# Altium PCB door_connect_1.5.PcbDoc
Units mil, origin at the board's own origin, x right, y up, seen from the top; angles counter-clockwise.
Board outline 1968.5 x 1880 mil, 2 copper layers (Top Layer, Bottom Layer); 2 components, 8 nets, 24 pads, 1 vias.
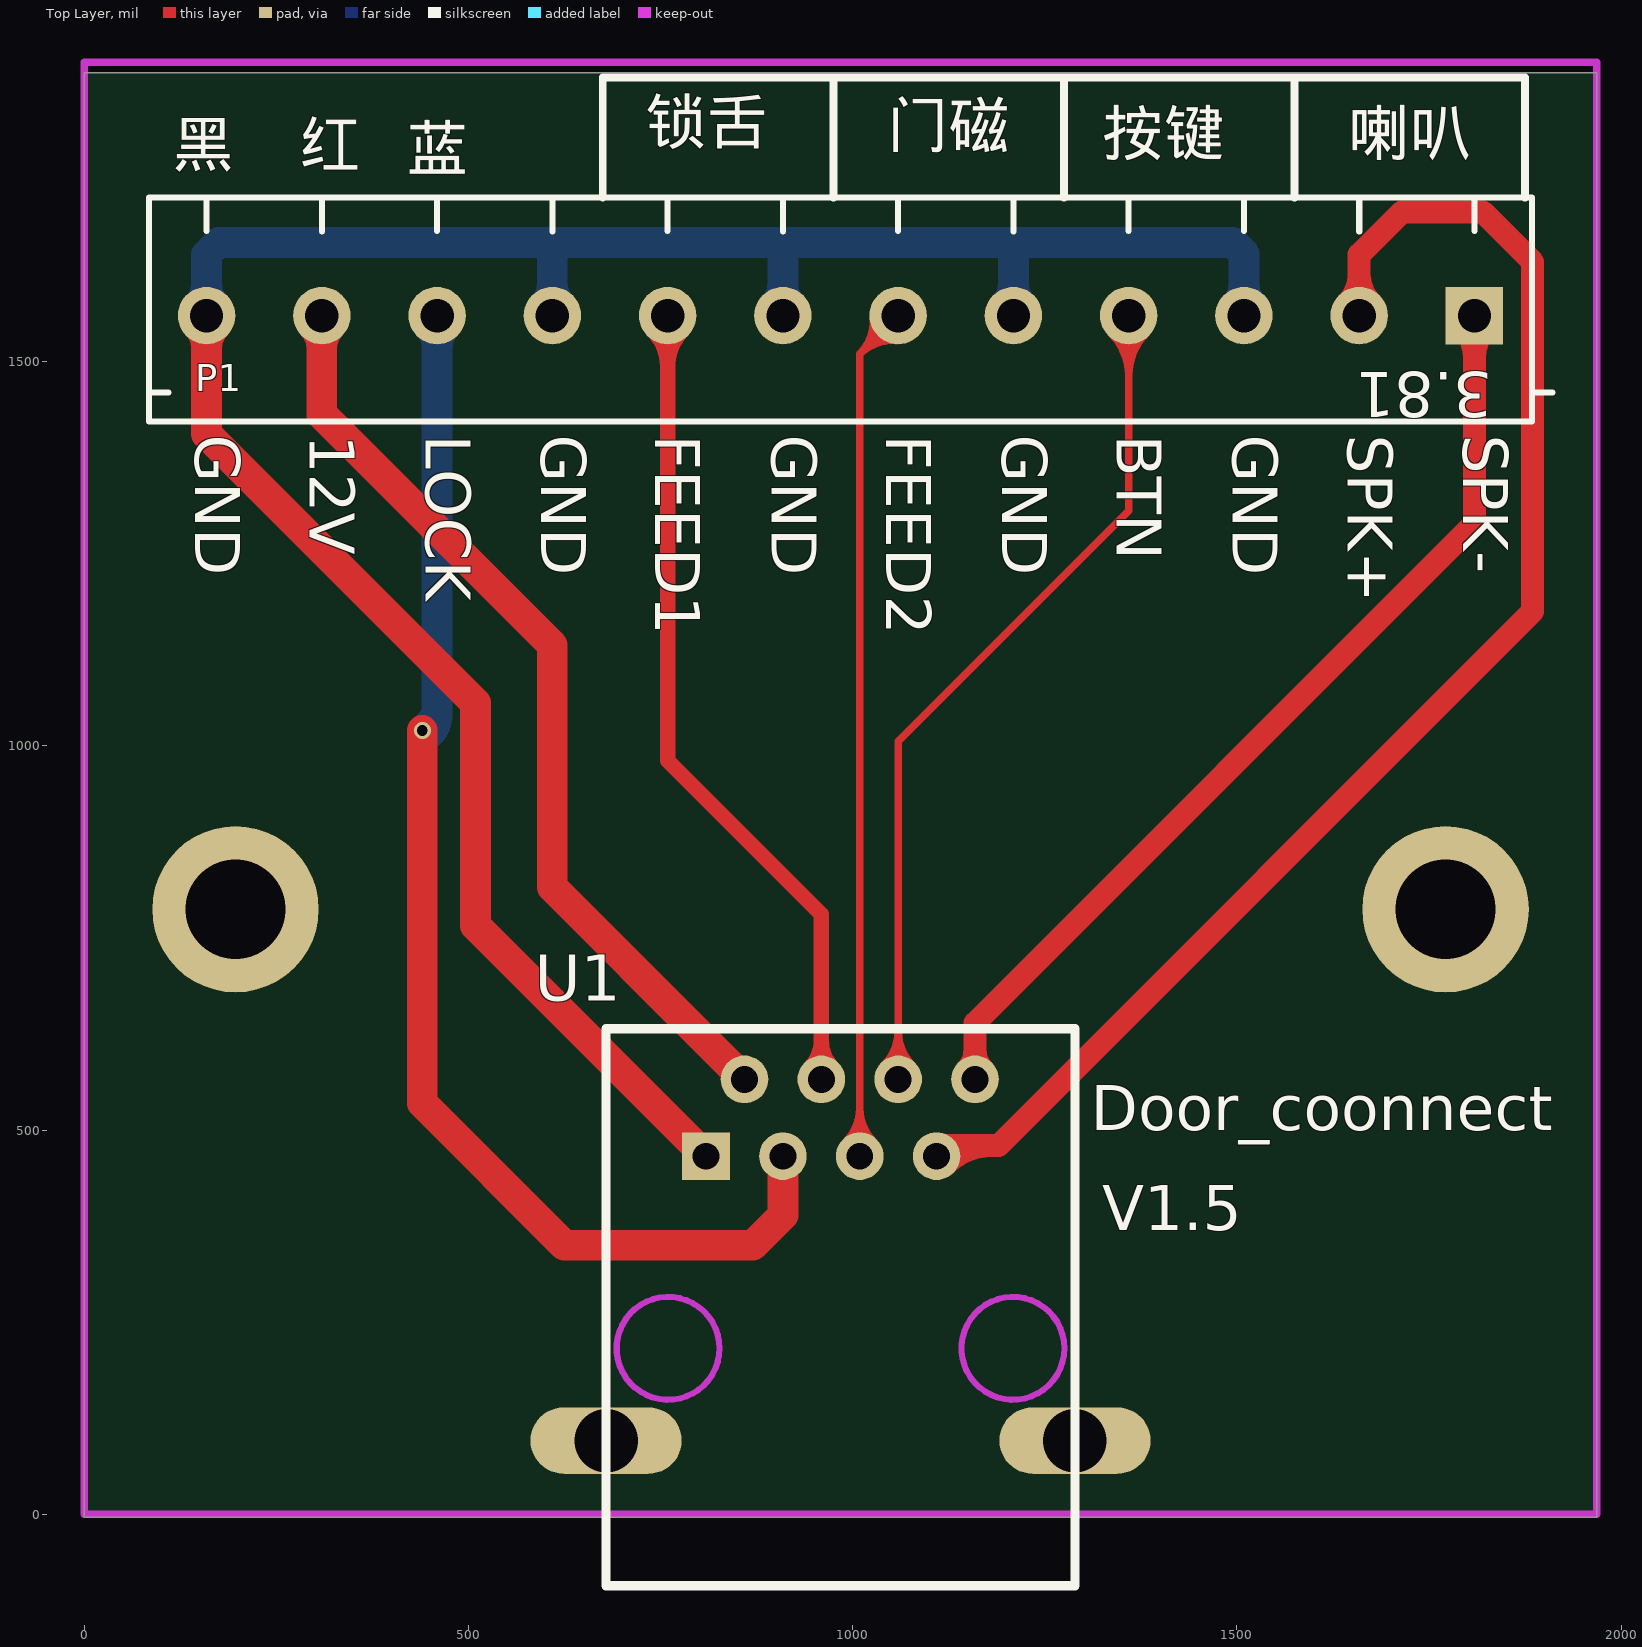
[diagram p0: Top Layer view]
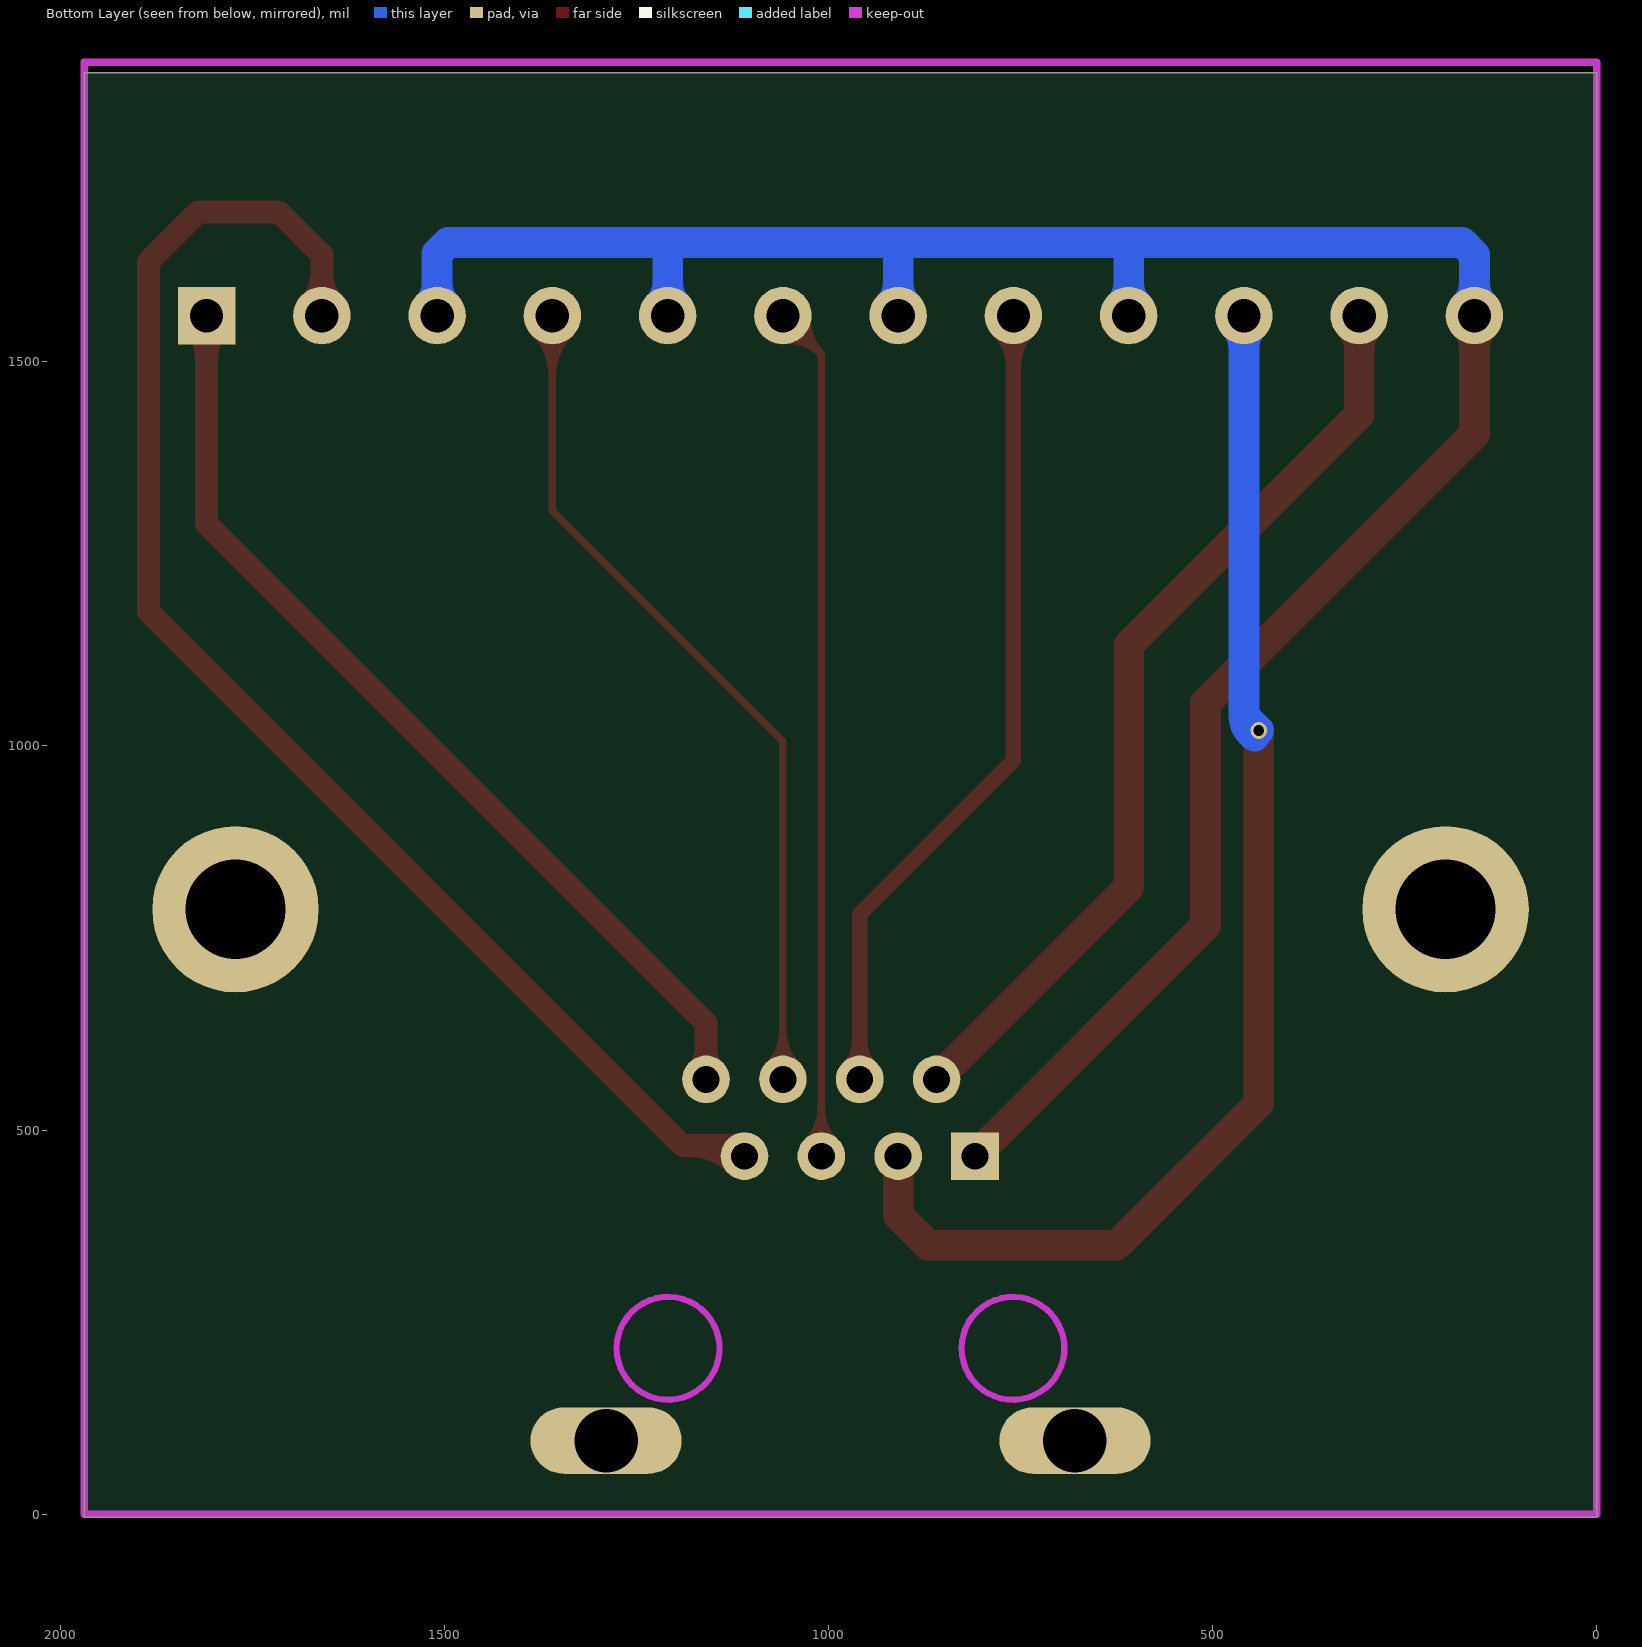
[diagram p1: Bottom Layer view, seen from below]

## Layer stack, top to bottom
Top Layer: signal copper 1.4
Dielectric: dielectric 12.6, FR-4, Dk 4.8
Bottom Layer: signal copper 1.4

## Board outline
0,-3.94 1968.5,-3.94 1968.5,1876.06 0,1876.06

## Design rules (kind name [scope] priority, off if disabled: settings)
Clearance [All] p1: gap=7
ComponentClearance [All] p1: gap=0 collisioncheckmode=3 verticalgap=0 showdistances=FALSE
HoleSize [All] p1: absolutevalues=TRUE maxlimit=1000 minlimit=1 maxpercent=80.000 minpercent=20.000
HoleToHoleClearance [All] p1: gap=7 allowstackedmicrovias=TRUE
MinimumSolderMaskSliver [All] p1: minsoldermaskwidth=0
PolygonConnect [All] p1: connectstyle=Relief reliefconductorwidth=10 reliefentries=4 polygonreliefangle="90 Angle"
RoomDefinition IO [InComponentClass('IO')] p1: confinementstyle=ConfineIn formatcopy=TRUE lockcomponents=FALSE outline -3535.75,-2283.94 -1535.75,-2283.94 -1535.75,-1283.94 -3535.75,-1283.94
RoutingVias [All] p1: holewidth=14 width=22 viastyle="Through Hole" minholewidth=14 minwidth=22 maxholewidth=280 maxwidth=500
SilkToSilkClearance [All] p1: silktosilkclearance=0
SilkscreenOverComponentPads [All] p1: minsilkscreentomaskgap=0
SolderMaskExpansion [All] p1: expansion=4
TestPointUsage [All] p1: valid=0 allowmultiple=FALSE
Testpoint [All] p1: side=15 testpointundercomponent=TRUE minsize=40 maxsize=100 preferedsize=60 minholesize=0 maxholesize=40 preferedholesize=32 testpointgrid=1 style=1023 order=0123456789
Width [All] p1: maxlimit=100 minlimit=7 preferedwidth=7
18 further rules are at their usual default settings.

## Components (designator, comment, footprint, x,y, rotation, side; value= is the part's Value field where it differs from the comment)
P1 "Header 12" KF128-3.81-12 984.25,1560 r180 top
U1 "RJ45-DTE" RJ45 984.25,216.06 r180 top

## Footprints (in the part's own frame and the unit in brackets; to place one, negate y for a bottom-side part, rotate by r counter-clockwise, add the part's x,y. Pads: shape width x height; smd on the part's side, far side on the other; paste and mask are expansions set on the pad)
KF128-3.81-12 [mm]
  rect 1.9x1.9 hole 1.1: 1(-20.955,0)
  round 1.9 hole 1.1: 2(-17.145,0) 3(-13.335,0) 4(-9.525,0) 5(-5.715,0) 6(-1.905,0) 7(1.905,0) 8(5.715,0) 9(9.525,0) 10(13.335,0) 11(17.145,0) 12(20.955,0)
  silkscreen extent -23.52,-3.9 22.86,3.5
RJ45 [mil]
  oval 196.85x86.61 hole 82.68: 0(-305.12,120.08) 0(305.12,120.08)
  rect 62x62 hole 35: 1(175,-250)
  round 62 hole 35: 2(125,-350) 3(75,-250) 4(25,-350) 5(-25,-250) 6(-75,-350) 7(-125,-250) 8(-175,-350)
  Keep-Out Layer circle w8: c-224.41,0 r66.93
  Keep-Out Layer circle w8: c224.41,0 r66.93
  silkscreen extent -305,-416 305,309

## Part data
P1: "Header, 12-Pin"

## Free pads (board coordinates)
  round 216.54 hole 129.92: 0(196.85,787.4) 0(1771.65,787.4)

## Via types
v1: diameter 22, hole 14, Top Layer to Bottom Layer, 1 vias

## Nets (pads, with @x,y where several pads share a name; then routed paths per layer and width w, separated by ;. In a path a pad name is that pad's centre, name@x,y a point inside that pad or via, vN(x,y) a via of type N, cw(c..) or ccw(c..) an arc to the next point about the centre after c; other vN are vias at no path point)
BTN: P1.4 U1.6 | length 1485.3
  Top Layer w10: U1.6@1040.87,584.45 ccw(c996.48,628.83) 1059.25,628.83 ccw(c1122.02,628.83) U1.6@1077.64,584.45 ; U1.6@1047.94,577.38 ccw(c1020.62,604.69) 1059.25,604.69 ccw(c1097.88,604.69) U1.6@1070.57,577.38 ; U1.6 1059.25,1006.06 1359.25,1306.06 P1.4 ; P1.4@1336.34,1537.09 cw(c1281.03,1481.78) 1359.25,1481.78 cw(c1437.48,1481.78) P1.4@1382.16,1537.09 ; P1.4@1343.41,1544.16 cw(c1305.17,1505.92) 1359.25,1505.92 cw(c1413.33,1505.92) P1.4@1375.09,1544.16
D12V: P1.11 U1.2 | length 1287.7
  Top Layer w40: P1.11@296.95,1547.7 cw(c267.24,1517.99) 309.25,1517.99 cw(c351.26,1517.99) P1.11@321.56,1547.7 ; P1.11 309.25,1431.06 609.25,1131.06 609.25,816.06 812.66,612.66 U1.2
FEED1: P1.8 U1.4 | length 1260.3
  Top Layer w20: P1.8@739.88,1540.62 cw(c693.1,1493.85) 759.25,1493.85 cw(c825.41,1493.85) P1.8@778.63,1540.62 ; P1.8 759.25,980.75 959.25,780.75 U1.4 ; U1.4@944.4,580.91 ccw(c908.55,616.76) 959.25,616.76 ccw(c1009.95,616.76) U1.4@974.1,580.91
FEED2: P1.6 U1.5 | length 1451.1
  Top Layer w10: U1.5@990.87,484.45 ccw(c946.48,528.83) 1009.25,528.83 ccw(c1072.02,528.83) U1.5@1027.64,484.45 ; U1.5@997.94,477.38 ccw(c970.62,504.69) 1009.25,504.69 ccw(c1047.88,504.69) U1.5@1020.57,477.38 ; U1.5 1009.25,1510 ; P1.6@1026.94,1557.6 cw(c966.16,1553.1) 1009.25,1510 ; P1.6@1036.91,1558.34 cw(c994.89,1555.23) 1024.69,1525.43 cw(c1054.48,1495.64) P1.6@1057.6,1537.66 ; P1.6@1056.86,1527.69 ccw(c1052.35,1466.9) 1009.25,1510 ; P1.6 1009.25,1510
GND: P1.3 P1.5 P1.7 P1.9 P1.12 U1.1 | length 3552.3
  Top Layer w40: P1.12@146.95,1547.7 cw(c117.24,1517.99) 159.25,1517.99 cw(c201.26,1517.99) P1.12@171.56,1547.7 ; P1.12 159.25,1406.06 509.25,1056.06 509.25,766.06 U1.1
  Bottom Layer w40: P1.12@146.95,1572.3 ccw(c117.24,1602.01) 159.25,1602.01 ccw(c201.26,1602.01) P1.12@171.56,1572.3 ; P1.12 159.25,1639.25 175,1655 1495,1655 1509.25,1640.75 P1.3 ; P1.9@596.95,1572.3 ccw(c567.24,1602.01) 609.25,1602.01 ccw(c651.26,1602.01) P1.9@621.56,1572.3 ; P1.9 609.25,1645.75 ; P1.7@896.95,1572.3 ccw(c867.24,1602.01) 909.25,1602.01 ccw(c951.26,1602.01) P1.7@921.56,1572.3 ; P1.7 909.25,1654.25 ; P1.5@1196.95,1572.3 ccw(c1167.24,1602.01) 1209.25,1602.01 ccw(c1251.26,1602.01) P1.5@1221.56,1572.3 ; P1.5 1209.25,1650.75 ; P1.3@1496.95,1572.3 ccw(c1467.24,1602.01) 1509.25,1602.01 ccw(c1551.26,1602.01) P1.3@1521.56,1572.3
LOCK_V+: P1.10 U1.3 | length 1804
  Top Layer w40: v1(440,1020) 440,535 625,350 870,350 909.25,389.25 U1.3
  Bottom Layer w40: v1(440,1020) 459.25,1039.25 ; v1@445.02,1012.53 ccw(c427.05,1039.25) 459.25,1039.25 ; v1@446.36,1013.64 ccw(c415.25,1044.75) 459.25,1044.75 ; P1.10@446.95,1547.7 cw(c417.24,1517.99) 459.25,1517.99 cw(c501.26,1517.99) P1.10@471.56,1547.7 ; P1.10 459.25,1039.25
SPEAKERA: P1.2 U1.7 | length 2032.1
  Top Layer w30: U1.7 1123.19,480 1190,480 1885,1175 1885,1630 1820,1695 1715,1695 1659.25,1639.25 P1.2 ; U1.7@1120.57,454.75 cw(c1181.53,393.79) 1181.53,480 ; P1.2@1643.41,1575.84 ccw(c1605.17,1614.08) 1659.25,1614.08 ccw(c1713.33,1614.08) P1.2@1675.09,1575.84
SPEAKERB: P1.1 U1.8 | length 1408.8
  Top Layer w30: U1.8@1147.94,577.38 ccw(c1120.62,604.69) 1159.25,604.69 ccw(c1197.88,604.69) U1.8@1170.57,577.38 ; U1.8 1159.25,639.25 1809.25,1289.25 P1.1 ; P1.1@1793.41,1544.16 cw(c1755.17,1505.92) 1809.25,1505.92 cw(c1863.33,1505.92) P1.1@1825.09,1544.16
pads on no net: U1.0

## Keep-outs
Keep-Out Layer:
  lines w10: 0,0 0,1889.76 1968.5,1889.76 1968.5,0 0,0

## Silkscreen, mask and mechanical layers (free items; w line width, h text height)
Top Overlay:
  lines w10: 675,1713.54 675,1870 975,1870 ; 1875,1713.54 1875,1870 1575,1870 ; 975,1870 975,1713.54 975,1870 ; 975,1870 1275,1870 ; 1275,1870 1275,1713.54 1275,1870 ; 1275,1870 1575,1870 ; 1575,1870 1575,1713.54 1575,1870
  text "锁舌" at 730,1765 h100
  text "门磁" at 1045,1760 h100
  text "按键" at 1325,1750 h100
  text "喇叭" at 1645,1750 h100
  text "黑" at 115,1735 h100
  text "红" at 280,1735 h100
  text "蓝" at 420,1730 h100
  text "GND" at 125,1405 h100 r270
  text "12V" at 273.93,1405 h100 r270
  text "LOCK" at 425,1405 h100 r270
  text "GND" at 575,1405 h100 r270
  text "FEED1" at 723.93,1405 h100 r270
  text "GND" at 875,1405 h100 r270
  text "FEED2" at 1023.93,1405 h100 r270
  text "GND" at 1175,1405 h100 r270
  text "BTN" at 1323.93,1405 h100 r270
  text "GND" at 1475,1405 h100 r270
  text "SPK+" at 1625,1405 h100 r270
  text "SPK-" at 1775,1405 h100 r270
  text "Door_coonnect" at 1310,480 h100
  text "V1.5" at 1325,350 h100

## Text inside footprints (layer, text, board x,y; h text height)
P1: Top Overlay "3.81" at 1832.68,1505.87 h100 r180